# Altium PCB machin.PcbDoc
Units mil, origin at the board's own origin, x right, y up, seen from the top; angles counter-clockwise.
Board outline 10130 x 5470 mil, 2 copper layers (Top Layer, Bottom Layer); 41 components, 107 nets, 405 pads, 91 vias.
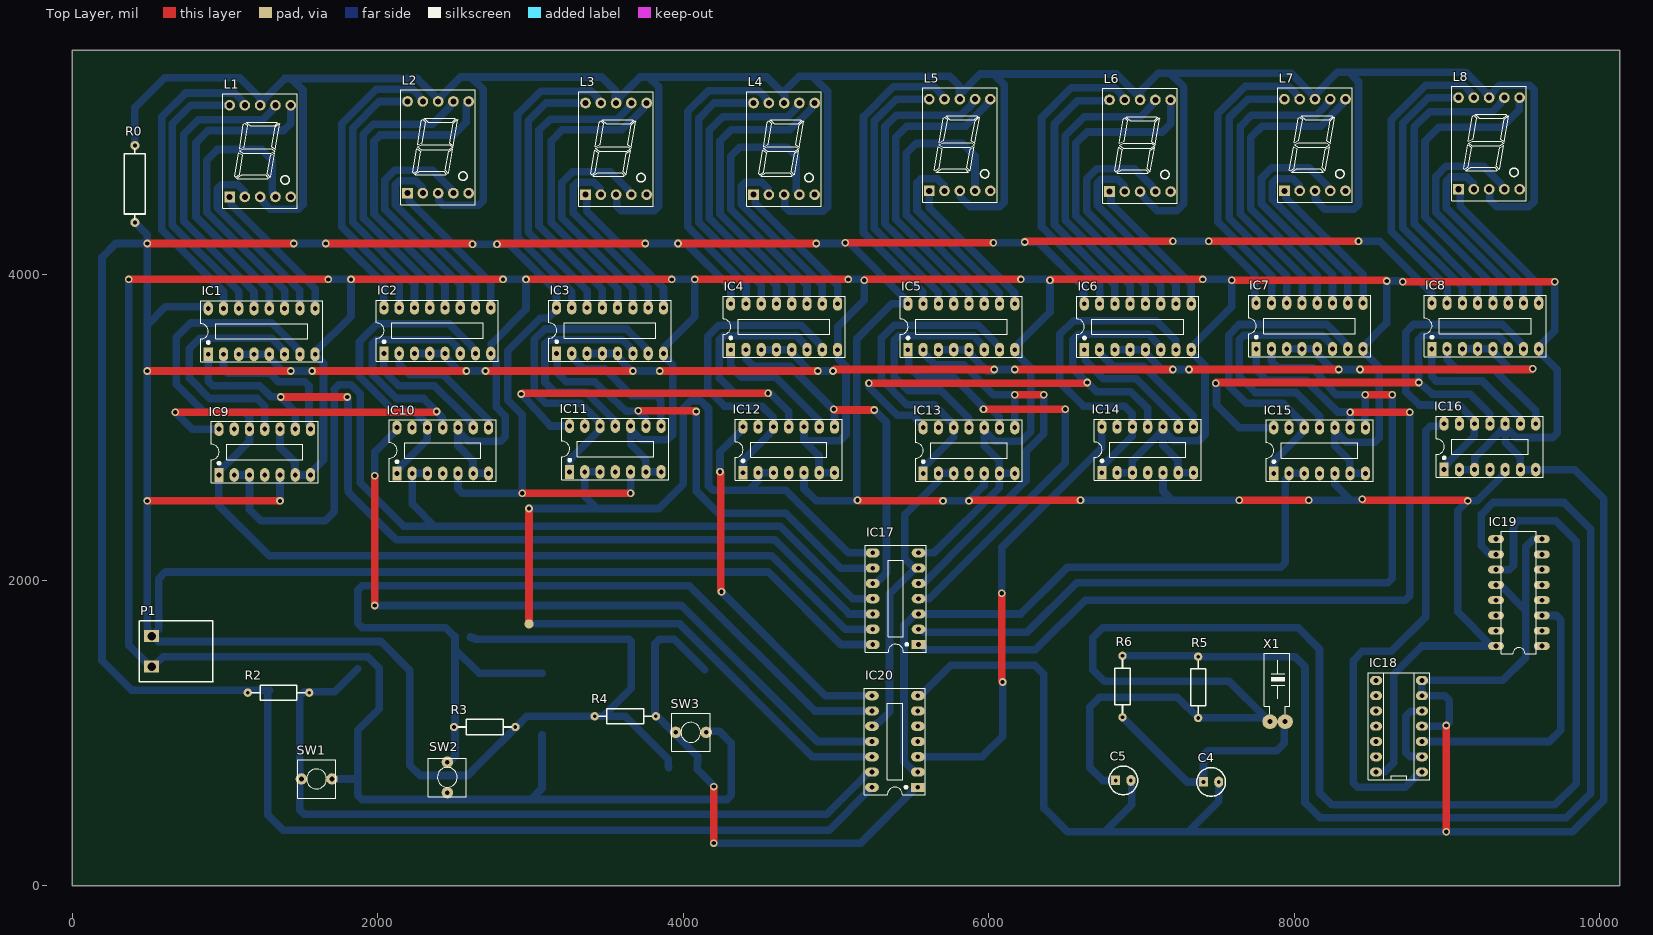
[diagram p0: Top Layer view]
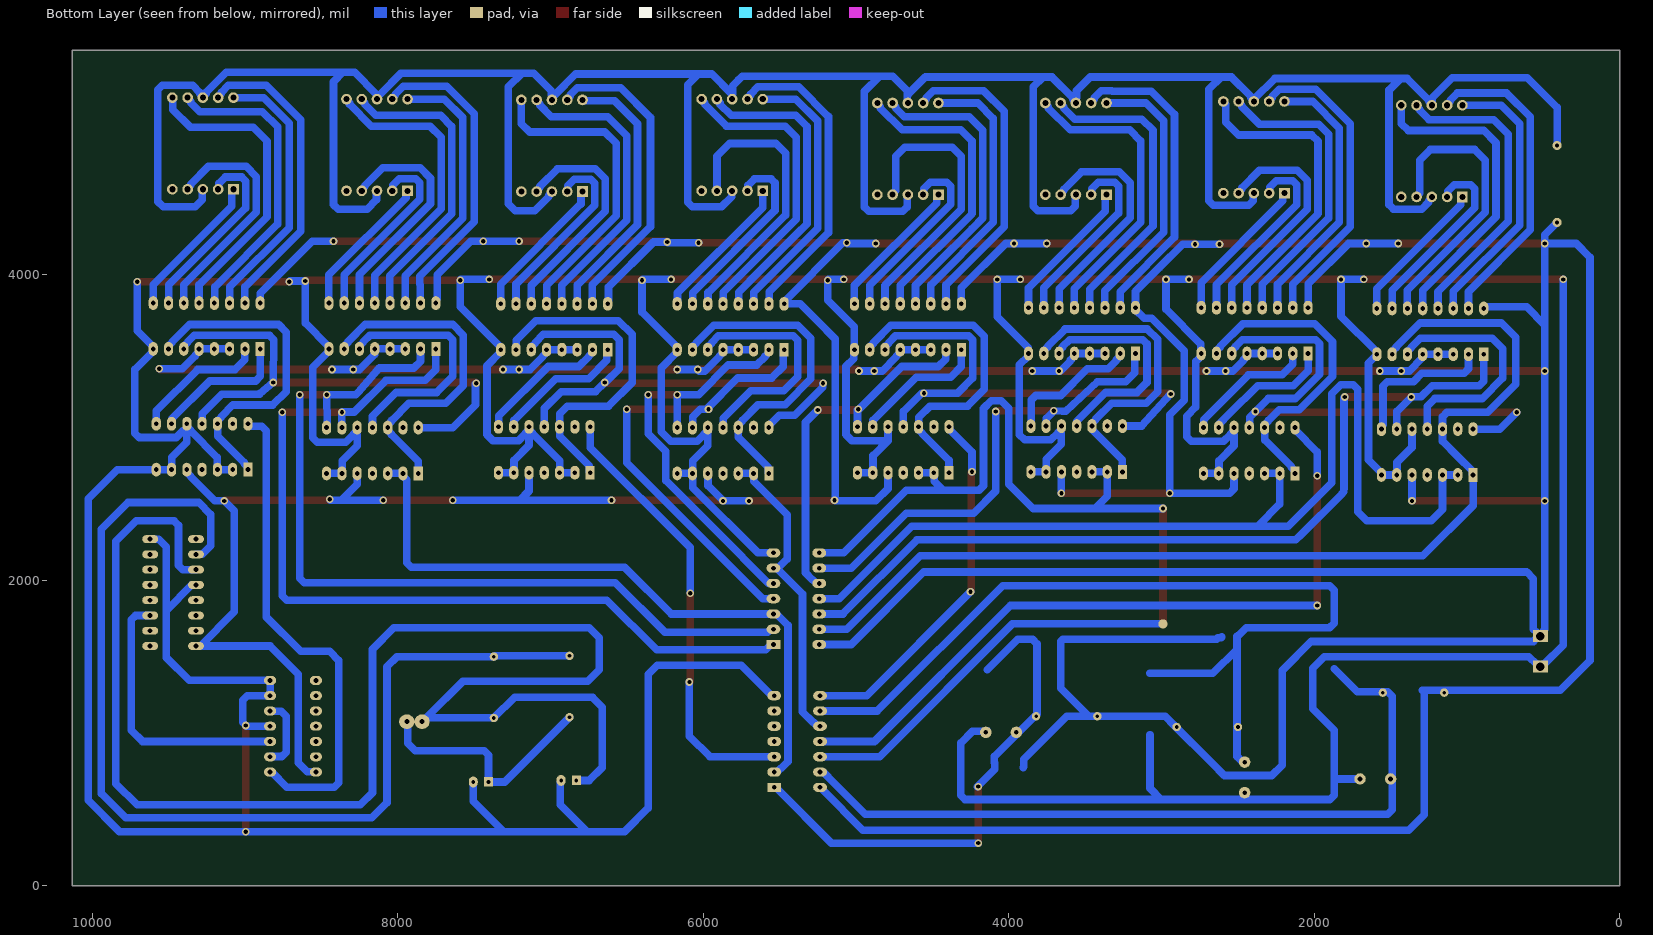
[diagram p1: Bottom Layer view, seen from below]

## Layer stack, top to bottom
Top Solder: solder mask 0.4, Solder Resist, Dk 3.5
Top Layer: signal copper 1.4
Dielectric 1: dielectric 12.6, FR-4, Dk 4.8
Bottom Layer: signal copper 1.4
Bottom Solder: solder mask 0.4, Solder Resist, Dk 3.5

## Board outline
0,0 10130,0 10130,5470 0,5470

## Design rules (kind name [scope] priority, off if disabled: settings)
Clearance [All] p1: gap=20 ignorepadtopadclearanceinfootprint=FALSE
PolygonConnect [All] p1: connectstyle=Relief reliefconductorwidth=10 reliefentries=4 polygonreliefangle="90 Angle" airgapwidth=10
RoutingLayers [All] p1: top layer_v5=FALSE bottom layer_v5=TRUE
RoutingVias [All] p1: holewidth=30 width=70 viastyle="Through Hole" minholewidth=30 minwidth=70 maxholewidth=30 maxwidth=70
SolderMaskExpansion [All] p1: expansion=4 istentingtop=FALSE
Width [All] p1: maxlimit=50 minlimit=50 preferedwidth=50
29 further rules are at their usual default settings.

## Components (designator, comment, footprint, x,y, rotation, side; value= is the part's Value field where it differs from the comment)
C4 "Cap Pol 3mm" C3MM 7455,680 r0 top
C5 "Cap Pol 3mm" C3MM 6880,690 r0 top
IC1 "74LS247" DIP16 890,3480 r0 top value=74LS238
IC2 "74LS247" DIP16 2040,3485 r0 top value=74LS238
IC3 "74LS247" DIP16 3170,3485 r0 top value=74LS238
IC4 "74LS247" DIP16 4310,3510 r0 top value=74LS238
IC5 "74LS247" DIP16 5470,3510 r0 top value=74LS238
IC6 "74LS247" DIP16 6625,3510 r0 top value=74LS238
IC7 "74LS247" DIP16 7750,3515 r0 top value=74LS238
IC8 "74LS247" DIP16 8900,3515 r0 top value=74LS238
IC9 "7490" DIP14/W0.3 960,2690 r0 top
IC10 "7490" DIP14/W0.3 2125,2700 r0 top
IC11 "7490" DIP14/W0.3 3255,2710 r0 top
IC12 "7490" DIP14/W0.3 4390,2705 r0 top
IC13 "7490" DIP14/W0.3 5570,2700 r0 top
IC14 "7490" DIP14/W0.3 6740,2705 r0 top
IC15 "7490" DIP14/W0.3 7865,2700 r0 top
IC16 "7490" DIP14/W0.3 8980,2725 r0 top
IC17 "7408" DIP14/W0.3 5540,1580 r90 top
IC18 "4013" DIP14 8685,1045 r90 top
IC19 "4060" *DIL16 9470,1920 r90 top
IC20 "7432" DIP14/W0.3 5535,645 r90 top
L1 "LED 7 Thanh" "LED 7x1 0.56" 1225,4785 r0 top
L2 "LED 7 Thanh" "LED 7x1 0.56" 2390,4810 r0 top
L3 "LED 7 Thanh" "LED 7x1 0.56" 3555,4800 r0 top
L4 "LED 7 Thanh" "LED 7x1 0.56" 4655,4800 r0 top
L5 "LED 7 Thanh" "LED 7x1 0.56" 5805,4825 r0 top
L6 "LED 7 Thanh" "LED 7x1 0.56" 6985,4820 r0 top
L7 "LED 7 Thanh" "LED 7x1 0.56" 8130,4825 r0 top
L8 "LED 7 Thanh" "LED 7x1 0.56" 9270,4835 r0 top
P1 "BIG_Header 2" "BIG_Header 2" 520,1635 r270 top
R0 "100R" "tro vach 1/2w" 410,4595 r90 top
R2 "620R" "tro vach 1/4w" 1350,1265 r180 top
R3 "620R" "tro vach 1/4w" 2700,1040 r0 top
R4 "620R" "tro vach 1/4w" 3620,1110 r180 top
R5 "620R" "tro vach 1/4w" 7370,1300 r90 top
R6 "620R" "tro vach 1/4w" 6875,1305 r90 top
SW1 "SW" SW2 1500,700 r0 top value="SW chip 2 pin"
SW2 "SW" SW2 2455,810 r270 top value="SW chip 2 pin"
SW3 "SW" SW2 3950,1005 r0 top value="SW chip 2 pin"
X1 "32,768 Khz" XT32k 7840,1075 r90 top value=32,768khz

## Footprints (in the part's own frame and the unit in brackets; to place one, negate y for a bottom-side part, rotate by r counter-clockwise, add the part's x,y. Pads: shape width x height; smd on the part's side, far side on the other; paste and mask are expansions set on the pad)
*DIL16 [mil]
  oval 52x104 hole 32: 1(-350,-150) 2(-250,-150) 3(-150,-150) 4(-50,-150) 5(50,-150) 6(150,-150) 7(250,-150) 8(350,-150) 9(350,150) 10(250,150) 11(150,150) 12(50,150) 13(-50,150) 14(-150,150) 15(-250,150) 16(-350,150)
  silkscreen extent -400,-115 400,115
"BIG_Header 2" [mm]
  rect 2x2.5 hole 1.4: 1(0,0) 2(5.08,0)
  silkscreen extent -2.54,-2.03 7.62,10.21, body extent -2.5,-1.75 7.58,10.25, height 3.15
C3MM [mm]
  rect 1.5x1.58 hole 0.6: 1(-1.27,0)
  oval 1.5x1.8 hole 0.6: 2(1.27,0)
  silkscreen extent -2.39,-2.39 2.39,2.39, body extent -2,-2.03 1.99,1.97, height 7.01
DIP14 [mm] "W.300/L.900"
  oval 1.5x2 hole 0.8: 1(-7.62,-3.81) 2(-5.08,-3.81) 3(-2.54,-3.81) 4(0,-3.81) 5(2.54,-3.81) 6(5.08,-3.81) 7(7.62,-3.81) 8(7.62,3.81) 9(5.08,3.81) 10(2.54,3.81) 11(0,3.81) 12(-2.54,3.81) 13(-5.08,3.81) 14(-7.62,3.81)
  silkscreen extent -8.89,-5.08 8.89,5.08, body extent -9.05,-3.88 9.05,3.88, height 4.5
DIP14/W0.3 [mil] "14PIN, W 300mil, Pin to pin 100mil"
  rect 60x90 hole 31: 1(0,0)
  oval 60x90 hole 31: 2(100,0) 3(200,0) 4(300,0) 5(400,0) 6(500,0) 7(600,0) 8(600,300) 9(500,300) 10(400,300) 11(300,300) 12(200,300) 13(100,300) 14(0,300)
  silkscreen extent -50,-50 650,350, body extent -75,-10 675,305, height 159
DIP16 [mil] "16 PIN, W 300mil, Pin to pin 100mil"
  rect 60x90 hole 31: 1(0,0)
  oval 60x90 hole 31: 2(100,0) 3(200,0) 4(300,0) 5(400,0) 6(500,0) 7(600,0) 8(700,0) 9(700,300) 10(600,300) 11(500,300) 12(400,300) 13(300,300) 14(200,300) 15(100,300) 16(0,300)
  silkscreen extent -50,-50 750,350, body extent -52,-57 752,356, height 299
"LED 7x1 0.56" [mil]
  rect 70x70 hole 40: 1(-195,-275)
  round 70 hole 40: 2(-95,-275) 3(5,-275) 4(105,-275) 5(205,-275) 6(205,325) 7(105,325) 8(5,325) 9(-95,325) 10(-195,325)
  silkscreen extent -239,-350 249,400, body extent -241,-349 251,399, height 315
SW2 [mil] "SW button 2pin, 250x 250 mil"
  round 75 hole 31: 1(0,0) 2(200,0)
  silkscreen extent -25,-125 225,125, body extent -18,-116 218,128, height 197
"tro vach 1/2w" [mm]
  round 1.5 hole 0.7: 1(-6.4,0) 2(6.4,0)
  silkscreen extent -5.84,-1.75 5.84,1.75, body extent -6.62,-1.75 6.62,1.75, height 3.5
"tro vach 1/4w" [mm]
  round 1.4 hole 0.6: 1(-5.1,0) 2(5.1,0)
  silkscreen extent -4.39,-1.25 4.42,1.25, body extent -5.38,-1.2 5.38,1.2, height 2.41
XT32k [mil] "Crystal 32k, 2 pin, real timer for DS1307"
  oval 95x100 hole 32: 1(0,0) 2(0,-100)
  silkscreen extent 50,-130 449,36

## Part data
C4 C5: "Polarized Capacitor (Axial)", LatestRevisionDate=17-Jul-2002, LatestRevisionNote="Re-released for DXP Platform.", PackageReference=POLAR0.8, Published=8-Jun-2000, Publisher="Altium Limited"
IC1 IC2 IC3 IC4 IC5 IC6 IC7 IC8: library part 74247, Copyright by=VanDungEvn@Gmail.com
IC9 IC10 IC11 IC12 IC13 IC14 IC15 IC16: "4-Bit Decade Counter"
IC17: "Quad 2-Input AND Gate"
IC18: "Dual D-Type Flip-Flop", Creat by=VanDungEvn@Gmail.com
IC19: "Standoff; Round; Nylon; 6-32x3/8 Thread; 1/4 OD; 3/4 Length", Package="TO-252-3 Abbatron", Check_prices=https://www.snapeda.com/parts/4060/Abbatron/view-part/?ref=eda, MF=Abbatron, MP=4060, SnapEDA_Link=https://www.snapeda.com/parts/4060/Abbatron/view-part/?ref=snap
IC20: "Quad 2-Input OR Gate"
L1 L2 L3 L4 L5 L6 L7 L8: library part "LED 7x1 0.56 Anot", "Dán", Chung_Loai=Dán, Don_Vi=Con, Ma_Hang=MH000834, Ten_Linh_Kien="Led 7 0.56 1 Số Anot (Sáng Đỏ)"
R0: library part "Tro Vach 1/2W 5% 100R", "Cắm", Chung_Loai=Cắm, Don_Vi=Con, Ma_Hang=MH007106, So_Chan=2, Ten_Linh_Kien="Trở 5% 1/2w 100R"
R2 R3 R4 R5 R6: library part "Tro Vach 1/4W 5% 620R", "Cắm", Chung_Loai=Cắm, Don_Vi=Con, Ma_Hang=MH007407, So_Chan=2, Ten_Linh_Kien="Trở Vạch 1/4W 5% 620R"
SW1 SW2 SW3: library part SW2, "Switch button 2 pin"
X1: library part XT32k, "Crystal 32,768kHz for timer real"

## Free pads (board coordinates)
  round 60 all layers, no hole: 55(2990,1715)

## Via types
v1: diameter 50, hole 28, Top Layer to Bottom Layer, 91 vias

## Nets (pads, with @x,y where several pads share a name; then routed paths per layer and width w, separated by ;. In a path a pad name is that pad's centre, name@x,y a point inside that pad or via, vN(x,y) a via of type N, cw(c..) or ccw(c..) an arc to the next point about the centre after c; other vN are vias at no path point)
GND: C4.2 C5.2 IC1.8 IC2.8 IC3.8 IC4.8 IC5.8 IC6.8 IC7.8 IC8.8 IC9.6 IC9.7 IC9.10 IC10.6 IC10.7 IC10.10 IC11.6 IC11.7 IC11.10 IC12.6 IC12.7 IC12.10 IC13.6 IC13.7 IC13.10 IC14.2 IC14.3 IC14.6 IC14.7 IC14.10 IC15.6 IC15.7 IC15.10 IC16.2 IC16.3 IC16.6 IC16.7 IC16.10 IC17.7 IC18.4 IC18.6 IC18.7 IC19.8 IC19.12 IC20.7 P1.2 SW1.2 SW2.2 SW3.2 | length 46957
  Top Layer w50: v1(370,3970) v1(1675,3970) ; v1(1825,3970) v1(2820,3970) ; v1(2970,3970) v1(3925,3970) ; v1(4075,3970) v1(5080,3970) ; v1(5185,3965) 5190,3970 v1(6210,3970) ; v1(6400,3965) 6405,3970 v1(7400,3970) ; v1(7590,3965) 8600,3965 v1(8605,3960) ; v1(8710,3955) v1(9705,3955) ; v1(8995,355) v1(8995,1050)
  Bottom Layer w50: v1(370,3970) 370,1575.16 495.79,1449.37 505.63,1449.37 P1.2 534.37,1449.37 544.21,1449.37 594.84,1500 1935,1500 2010,1425 2010,1159.21 1870,1019.21 1870,705 ; IC9.10@1361.91,2967.02 1361.91,2988.09 IC9.10 1360,2870 1458.09,2771.91 1458.09,2691.91 IC9.6 IC9.7 1563.27,2693.27 1563.27,2708.27 1645,2790 1645,3420.71 1602.62,3463.09 1594.62,3463.09 1590,3467.71 IC1.8 1590,3495 1825,3730 v1(1825,3970) v1(1675,3970) ; SW1.2 1865,700 1870,705 ; 2525,2953.93 2525,2880 2623.09,2781.91 2623.09,2701.91 IC10.6 IC10.7 ; IC10.10 2525,2982.29 2550,2957.29 2550,2953.93 2593.93,2910 2805.71,2910 2835,2939.29 2835,3075 2775,3135 2775,3432.29 2740,3467.29 IC2.8 2741.91,3486.91 2741.91,3546.91 2970,3775 v1(2970,3970) v1(2820,3970) ; 3075,989.21 3075,640 3000,565 ; 3655,2963.93 3655,2890 3753.09,2791.91 3753.09,2711.91 IC11.6 IC11.7 ; IC11.10 3655,2992.29 3680,2967.29 3680,2963.93 3723.93,2920 3895.71,2920 3930,2954.29 3930,3410 3873.27,3466.73 3873.27,3481.73 IC3.8 3871.91,3486.91 3871.91,3521.91 4075,3725 v1(4075,3970) v1(3925,3970) ; SW3.2@4140,1014.21 4140.98,1013.23 4236.77,1013.23 4315,935 4315,594.29 4285.71,565 3000,565 ; IC12.10 4790,2915 ; IC12.7 IC12.6 4888.09,2706.91 4888.09,2816.91 4790,2915 ; v1(5080,3970) 5180,3970 v1(5185,3965) 5185,3834.81 5010,3659.81 IC4.8 5011.91,3508.09 5011.91,3486.02 5014.78,3483.15 5014.78,3451.29 5065,3401.07 5065,2954.29 5025.71,2915 4790,2915 ; IC20.7 5550,1245 5750,1445 6300,1445 6360,1385 6360,510 6515,355 6760,355 ; IC17.7 5641.01,2180 6068.09,2607.08 6068.09,2698.09 IC13.6 ; IC13.10 IC13.10@5970,2982.29 ; IC13.7 IC13.6 ; v1(6210,3970) 6395,3970 v1(6400,3965) 6400,3755 6173.27,3528.27 6173.27,3513.27 IC5.8 6170,3495 6275,3390 6275,2973.76 6211.24,2910 6038.93,2910 5995,2953.93 5995,2957.29 IC13.10@5970,2982.29 ; IC14.2 IC14.3 6940,2783.93 7115,2958.93 7115,2962.29 IC14.10@7140,2987.29 ; C5.2 6930,681.64 6935,676.64 6935,530 6760,355 ; 7140,2958.93 7140,2885 7238.09,2786.91 7238.09,2706.91 IC14.6 IC14.7 ; IC14.10 IC14.10@7140,2987.29 ; v1(7400,3970) 7585,3970 v1(7590,3965) 7590,3790 7328.27,3528.27 7328.27,3513.27 IC6.8 7328.27,3506.73 7328.27,3491.73 7415,3405 7415,2954.29 7375.71,2915 7208.93,2915 7165,2958.93 7165,2962.29 IC14.10@7140,2987.29 ; C4.2 7505,555 7305,355 ; 8265,2953.93 8265,2879.94 8363.09,2781.85 8363.09,2701.91 IC15.6 IC15.7 ; IC15.10 8265,2982.29 8290,2957.29 8290,2953.93 8338.93,2905 8525.71,2905 8555,2934.29 8555,3395 8450,3500 IC7.8 8450,3530 8605,3685 v1(8605,3960) 8705,3960 v1(8710,3955) ; IC18.4 8990,1045 9015,1070 9015,1215.71 8985.71,1245 IC18.6 IC18.7 9365,1345 9515,1495 9515,1801.41 ; IC16.2 IC16.3 9180,2803.93 9355,2978.93 9355,2982.29 9380,3007.29 IC16.10 ; IC19.12 9346.41,1970 9515,1801.41 ; 9380,2978.93 9380,2905 9478.09,2806.91 9478.09,2726.91 IC16.6 ; 9405,2978.93 9448.93,2935 9690.71,2935 9720,2964.29 9720,3380 9600,3500 IC8.8 9600,3530 9705,3635 v1(9705,3955) ; IC16.6@9495,2725 IC16.7 9835,2725 10025,2535 10025,559.29 9820.71,355 v1(8995,355) 7305,355 ; IC19.8 9619.62,2269.62 9564.62,2269.62 9515,2220 9515,1801.41 ; 1870,705 1870,594.29 1899.29,565 3000,565 ; IC13.10@5970,2982.29 5970,2880 6068.09,2781.91 6068.09,2701.91 IC13.6 ; 6760,355 7305,355
NetC4_1: C4.1 R6.1 X1.2 | length 1586.3
  Bottom Layer w50: R6.1 7299.21,680 C4.1 7405,855.71 7434.29,885 7885,885 7935,935 7935,1070 X1.2
NetC5_1: C5.1 IC19.11 R5.1 X1.1 | length 10068
  Bottom Layer w50: C5.1 6825.51,690 6825.47,689.96 6744.62,689.96 6659.62,774.96 6659.62,1169.96 6724.62,1234.96 7233.83,1234.96 7369.58,1099.21 R5.1 7370.75,1099.96 X1.1@7799.94,1099.96 ; X1.1 7837.08,1075 7806.03,1106.05 7572.12,1339.96 6754.62,1339.96 6679.62,1414.96 6679.62,1624.96 6744.62,1689.96 8024.62,1689.96 8164.62,1549.96 8164.62,609.96 8244.62,529.96 9704.62,529.96 9844.62,669.96 9844.62,2255.67 9710.33,2389.96 9464.29,2389.96 9435,2360.67 9435,2099.63 9405.71,2070.34 9320.34,2070.34 IC19.11
NetIC1_1: IC1.1 IC9.9 IC17.12 | length 5766.7
  Top Layer w50: v1(1365,3200) v1(1800,3200)
  Bottom Layer w50: IC1.1 890,3304.29 919.29,3275 1228,3275 1301.09,3201.91 1363.09,3201.91 v1(1365,3200) 1460,3105 IC9.9 ; v1(1800,3200) 1805.39,3194.61 1805.39,2599.87 1805.58,2599.69 1805.58,2579.42 1820.03,2564.96 2085,2300 2120,2265 4600,2265 5085,1780 IC17.12
NetIC1_2: IC1.2 IC9.8 | length 987.6
  Bottom Layer w50: IC1.2 990,3384.29 1019.29,3355 1294.94,3355 1349.94,3300 1520.71,3300 1550,3270.71 1550,3017.71 1560,3007.71 IC9.8
NetIC1_6: IC1.6 IC9.11 | length 1621.5
  Bottom Layer w50: IC9.11 1260,3140 1210,3190 900,3190 765,3325 765,3515 835,3585 1306.07,3585 1365,3526.07 1365,3522.71 1390,3497.71 IC1.6
NetIC1_7: IC1.7 IC9.1 IC9.12 IC17.13 | length 7099.4
  Bottom Layer w50: IC1.7 1490,3497.71 1465,3522.71 1465,3526.07 1306.07,3685 775,3685 680,3590 680,3285 865,3100 1130.71,3100 1160,3070.71 IC9.12 1160,2911.07 1061.97,2813.03 965,2716.07 965,2695 IC9.1 960,2490 1290,2160 4580,2160 5060,1680 IC17.13
NetIC1_9: IC1.9 L1.1 | length 962
  Bottom Layer w50: L1.1 1040,4500 1040,4460 1590,3910 IC1.9
NetIC1_10: IC1.10 L1.2 | length 1251.1
  Bottom Layer w50: L1.2 1126.17,4513.83 1126.17,4547.47 1083.64,4590 976.36,4590 950,4563.64 950,4440 1490,3900 IC1.10
NetIC1_11: IC1.11 L1.4 | length 1917.5
  Bottom Layer w50: L1.4 1330,4515.41 1310,4535.41 1310,4750 1240,4820 950,4820 880,4750 880,4410 1390,3900 IC1.11
NetIC1_12: IC1.12 L1.6 | length 2075.6
  Bottom Layer w50: IC1.12 1290,3900 810,4380 810,4865 890,4945 1385,4945 1430,4990 L1.6
NetIC1_13: IC1.13 L1.7 | length 2016.9
  Bottom Layer w50: IC1.13 1190,3890 730,4350 730,4920 825,5015 1248.14,5015 1310,5076.86 1310,5084.59 1330,5104.59 L1.7
NetIC1_14: IC1.14 L1.10 | length 1814.9
  Bottom Layer w50: L1.10 775,5110 655,4990 655,4326.01 1090,3891.01 IC1.14
NetIC1_15: IC1.15 L1.9 | length 2072
  Bottom Layer w50: IC1.15 990,3890 585,4295 585,5033.62 741.38,5190 1063.14,5190 1110,5143.14 1110,5135.41 1130,5115.41 L1.9
NetIC2_1: IC2.1 IC10.9 | length 863.8
  Bottom Layer w50: IC2.1 2040,3372.99 2137.99,3275 2370,3275 2555,3090 2556.07,3090 2620,3026.07 2620,3022.71 2625,3017.71 IC10.9
NetIC2_2: IC2.2 IC10.8 | length 856.2
  Bottom Layer w50: IC2.2 2140,3415 2210,3345 2430,3345 2723.09,3051.91 2723.09,3001.91 IC10.8
NetIC2_6: IC2.6 IC9.14 IC10.11 | length 3520.5
  Top Layer w50: v1(675,3100) 2380,3100 v1(2385,3105)
  Bottom Layer w50: v1(675,3100) 785,2990 IC9.14 ; IC10.11 2423.09,3001.91 2423.09,3066.91 2300,3190 2123.99,3190 1965,3348.99 1965,3548.64 1991.36,3575 2471.07,3575 2515,3531.07 2515,3527.71 2540,3502.71 IC2.6
NetIC2_7: IC2.7 IC10.1 IC10.12 | length 2108.3
  Bottom Layer w50: IC10.1 2125,2715 2150,2740 2150,2746.07 2323.09,2919.15 2323.09,2998.09 IC10.12 2325,3017.71 2300,3042.71 2300,3046.07 2229.26,3116.8 2098.2,3116.8 1880,3335 1880,3562.63 1997.37,3680 2466.07,3680 2615,3531.07 2615,3527.71 2640,3502.71 IC2.7
NetIC2_9: IC2.9 L2.1 | length 975.7
  Bottom Layer w50: L2.1 2205,4525 2205,4483.99 2740,3948.99 IC2.9
NetIC2_10: IC2.10 L2.2 | length 1264.9
  Bottom Layer w50: L2.2 2291.17,4538.83 2291.17,4572.47 2248.64,4615 2141.36,4615 2115,4588.64 2115,4459.13 2640,3934.13 IC2.10
NetIC2_11: IC2.11 L2.4 | length 1585.4
  Bottom Layer w50: L2.4 2495,4540.41 2475,4560.41 2475,4568.14 2358.14,4685 2112.37,4685 2045,4617.63 2045,4430.13 2540,3935.13 IC2.11
NetIC2_12: IC2.12 L2.6 | length 2080.6
  Bottom Layer w50: IC2.12 2440,3936.14 1975,4401.14 1975,4875 2015,4915 2495,4915 2580,5000 2580,5114.59 2595,5129.59 L2.6
NetIC2_13: IC2.13 L2.7 | length 2001.9
  Bottom Layer w50: IC2.13 2340,3937.14 1905,4372.14 1905,4920 1970,4985 2358.14,4985 2475,5101.86 2475,5109.59 2495,5129.59 L2.7
NetIC2_14: IC2.14 L2.10 | length 1775.2
  Bottom Layer w50: L2.10 2010,5135 1835,4960 1835,4343.15 2240,3938.15 IC2.14
NetIC2_15: IC2.15 L2.9 | length 2023.8
  Bottom Layer w50: IC2.15 2140,3939.15 1765,4314.15 1765,4988.99 1991.01,5215 2228.14,5215 2275,5168.14 2275,5160.41 2295,5140.41 L2.9
NetIC3_1: IC3.1 IC11.9 IC17.9 | length 3144.3
  Top Layer w50: v1(3705,3110) 4067.29,3110 4072.29,3105 v1(4085,3105)
  Bottom Layer w50: IC3.1 3175,3480 3175,3360 3235,3300 3418.55,3300 3625.95,3107.78 3646.51,3107.78 3647.45,3107.81 v1(3705,3110) 3705,3107.29 3753.09,3059.21 3753.09,3011.91 IC11.9 ; v1(4085,3105) 4085,2585 4230,2440 4670,2440 5030,2080 IC17.9
NetIC3_2: IC3.2 IC11.8 | length 893
  Bottom Layer w50: IC3.2 3270,3467.29 3295,3442.29 3295,3438.93 3348.93,3385 3485,3385 3660,3210 3823.8,3210 3853.09,3180.71 3853.09,3011.91 IC11.8
NetIC3_6: IC3.6 IC11.11 | length 1484.8
  Bottom Layer w50: IC11.11 3553.09,3011.91 3553.09,3041.91 3365,3230 3160,3230 3095,3295 3095,3548.64 3121.36,3575 3601.07,3575 3645,3531.07 3645,3527.71 3670,3502.71 IC3.6
NetIC3_7: IC3.7 IC11.1 IC11.12 | length 2112.5
  Bottom Layer w50: IC11.1 3256.07,2711.07 3256.07,2790 3453.09,2987.02 3453.09,3008.09 IC11.12 3455,3027.71 3430,3052.71 3430,3056.07 3326.07,3160 3100,3160 3025,3235 3025,3577.63 3092.37,3645 3631.07,3645 3745,3531.07 3745,3527.71 3770,3502.71 IC3.7
NetIC3_9: IC3.9 L3.1 | length 951.2
  Bottom Layer w50: L3.1 3368.99,4516.01 3368.99,4415 3870,3913.99 IC3.9
NetIC3_10: IC3.10 L3.2 | length 1240.4
  Bottom Layer w50: L3.2 3456.17,4528.83 3456.17,4562.47 3413.64,4605 3306.36,4605 3280,4578.64 3280,4500 3280,4405 3770,3915 IC3.10
NetIC3_11: IC3.11 L3.4 | length 1565
  Bottom Layer w50: L3.4 3660,4530.41 3640,4550.41 3640,4558.14 3523.14,4675 3277.37,4675 3205,4602.63 3205,4373.99 3670,3908.99 IC3.11
NetIC3_12: IC3.12 L3.6 | length 2006.8
  Bottom Layer w50: IC3.12 3570,3910 3135,4345 3135,4875.71 3208.08,4948.79 3596.92,4948.79 3740,5091.86 3740,5099.59 3760,5119.59 L3.6
NetIC3_13: IC3.13 L3.7 | length 2019.6
  Bottom Layer w50: IC3.13 3470,3905 3055,4320 3055,4945.71 3128.08,5018.79 3566.92,5018.79 3640,5091.86 3640,5099.59 3660,5119.59 L3.7
NetIC3_14: IC3.14 L3.10 | length 1806.1
  Bottom Layer w50: L3.10 3101.68,5125 2985,5008.32 2985,4280 3370,3895 IC3.14
NetIC3_15: IC3.15 L3.9 | length 2062.1
  Bottom Layer w50: IC3.15 3270,3890 2915,4245 2915,5050 3065.87,5200.87 3322.73,5200.87 3326.86,5205 3393.14,5205 3440,5158.14 3440,5150.41 3460,5130.41 L3.9
NetIC4_1: IC4.1 IC12.9 | length 877
  Bottom Layer w50: IC4.1 4310,3400 4380,3330 4605,3330 4888.09,3046.91 4888.09,3006.91 IC12.9
NetIC4_2: IC4.2 IC12.8 IC17.10 | length 2366.5
  Top Layer w50: v1(4985,3120) 4990,3115 v1(5250,3115)
  Bottom Layer w50: IC4.2 4411.75,3508.25 4411.75,3448.25 4460,3400 4699.94,3400 4979.94,3120 v1(4985,3120) ; IC12.8 v1@4990,3115 ; IC17.10 5257.71,1980 5282.71,2005 5286.07,2005 5330,2048.93 5330,3035 v1(5250,3115)
NetIC4_6: IC4.6 IC11.14 IC12.11 | length 3555.6
  Top Layer w50: v1(2940,3220) 2945,3225 v1(4555,3225)
  Bottom Layer w50: v1(2940,3220) 3130,3010 IC11.14 ; IC12.11 4690,3105 4570,3225 4335,3225 4235,3325 4235,3573.64 4261.36,3600 4741.07,3600 4785,3556.07 4785,3552.71 4810,3527.71 IC4.6
NetIC4_7: IC4.7 IC12.1 IC12.12 | length 2155.7
  Bottom Layer w50: IC12.1 4391.07,2706.07 4391.07,2785 4488.03,2881.97 4565,2958.93 4565,2962.29 4590,2987.29 IC12.12 4588.25,3006.75 4588.25,3066.75 4515,3140 4270,3140 4160,3250 4160,3597.63 4232.37,3670 4771.07,3670 4885,3556.07 4885,3552.71 4910,3527.71 IC4.7
NetIC4_9: IC4.9 L4.1 | length 942.8
  Bottom Layer w50: L4.1 4470,4515 4470,4470 5010,3930 IC4.9
NetIC4_10: IC4.10 L4.2 | length 1231.9
  Bottom Layer w50: L4.2 4556.17,4528.83 4556.17,4562.47 4513.64,4605 4406.36,4605 4380,4578.64 4380,4461.01 4910,3931.01 IC4.10
NetIC4_11: IC4.11 L4.4 | length 1910.1
  Bottom Layer w50: L4.4 4760,4530.41 4740,4550.41 4740,4775 4680,4835 4370,4835 4310,4775 4310,4430 4810,3930 IC4.11
NetIC4_12: IC4.12 L4.6 | length 1991.3
  Bottom Layer w50: IC4.12 4710,3931.01 4240,4401.01 4240,4875.71 4313.08,4948.79 4696.92,4948.79 4840,5091.86 4840,5099.59 4860,5119.59 L4.6
NetIC4_13: IC4.13 L4.7 | length 1989.9
  Bottom Layer w50: IC4.13 4610,3932.01 4478.99,4063.02 4240,4302.01 4170,4372.01 4170,4945.71 4259.29,5035 4683.14,5035 4740,5091.86 4740,5099.59 4760,5119.59 L4.7
NetIC4_14: IC4.14 L4.10 | length 1785.2
  Bottom Layer w50: L4.10 4201.84,5125 4100,5023.16 4100,4343.02 4510,3933.02 IC4.14
NetIC4_15: IC4.15 L4.9 | length 2044.2
  Bottom Layer w50: IC4.15 4410,3934.02 4030,4314.02 4030,5070 4165,5205 4493.14,5205 4540,5158.14 4540,5150.41 4560,5130.41 L4.9
NetIC5_1: IC5.1 IC13.9 IC17.4 | length 3135.8
  Top Layer w50: v1(5965,3120) v1(6500,3120)
  Bottom Layer w50: IC5.1 5475,3505 5475,3400 5550,3325 5774.27,3325 5788.92,3310.36 ; IC17.4 5610,1880 6500,2770 v1(6500,3120) ; 5788.93,3310.34 5789.14,3310.13 5965,3134.27 v1(5965,3120) 6020,3120 6068.09,3071.91 6068.09,3001.91 IC13.9
NetIC5_2: IC5.2 IC13.8 IC17.5 | length 2732.4
  Top Layer w50: v1(6170,3215) v1(6360,3215)
  Bottom Layer w50: IC17.5 5541.91,1981.91 5572.98,1981.91 5908.99,2317.92 6245,2653.93 6245,2844.76 6360,2959.76 v1(6360,3215) ; IC5.2 5570,3492.29 5595,3467.29 5595,3463.93 5648.93,3410 5835,3410 6030,3215 v1(6170,3215) IC13.8
NetIC5_6: IC5.6 IC13.11 | length 1552.5
  Bottom Layer w50: IC13.11 5868.25,3001.75 5868.25,3061.75 5688.61,3241.39 5471.6,3241.39 5380,3332.99 5380,3570.71 5409.29,3600 5901.07,3600 5945,3556.07 5945,3552.71 5970,3527.71 IC5.6
NetIC5_7: IC5.7 IC13.1 IC13.12 | length 2157
  Bottom Layer w50: IC13.1 5575,2705 5575,2741.07 5658.93,2825 5770,2936.07 5770,3017.71 5745,3042.71 5745,3046.07 5641.07,3150 5463.99,3150 5295,3318.99 5295,3584.71 5380.29,3670 5931.07,3670 6045,3556.07 6045,3552.71 6070,3527.71 IC5.7
NetIC5_9: IC5.9 L5.1 | length 972
  Bottom Layer w50: L5.1 5610,4440 6168.09,3881.91 6168.09,3811.91 IC5.9
NetIC5_10: IC5.10 L5.2 | length 1261.1
  Bottom Layer w50: L5.2 5706.17,4553.83 5706.17,4587.47 5663.64,4630 5556.36,4630 5530,4603.64 5530,4421.01 6068.09,3882.92 6068.09,3811.91 IC5.10
NetIC5_11: IC5.11 L5.4 | length 1933.4
  Bottom Layer w50: L5.4 5909.82,4550.18 5909.82,4775.18 5825,4860 5525,4860 5460,4795 5460,4392.01 5968.09,3883.92 5968.09,3811.91 IC5.11
NetIC5_12: IC5.12 L5.6 | length 2020.5
  Bottom Layer w50: IC5.12 5868.09,3811.91 5868.09,3884.93 5390,4363.02 5390,4900.71 5463.08,4973.79 5846.92,4973.79 5990,5116.86 5990,5124.59 6010,5144.59 L5.6
NetIC5_13: IC5.13 L5.7 | length 2019.1
  Bottom Layer w50: IC5.13 5768.09,3811.91 5768.09,3885.93 5628.99,4025.03 5390,4264.02 5320,4334.02 5320,4970.71 5393.08,5043.79 5816.92,5043.79 5890,5116.86 5890,5124.59 5910,5144.59 L5.7
NetIC5_14: IC5.14 L5.10 | length 1790.2
  Bottom Layer w50: L5.10 5392.99,5150 5250,5007.01 5250,4305.03 5668.09,3886.94 5668.09,3811.91 IC5.14
NetIC5_15: IC5.15 L5.9 | length 2038.7
  Bottom Layer w50: IC5.15 5568.09,3811.91 5568.09,3887.94 5180,4276.03 5180,5036.01 5373.99,5230 5643.14,5230 5690,5183.14 5690,5175.41 5710,5155.41 L5.9
NetIC6_1: IC6.1 IC14.9 | length 885.7
  Bottom Layer w50: IC6.1 6630,3505 6630,3440 6750,3320 6965,3320 7238.09,3046.91 7238.09,3006.91 IC14.9
NetIC6_2: IC6.2 IC14.8 | length 877.5
  Bottom Layer w50: IC6.2 6725,3492.29 6750,3467.29 6750,3463.93 6813.93,3400 7014.94,3400 7338.09,3076.85 7338.09,3006.91 IC14.8
NetIC6_6: IC6.6 IC13.14 IC14.11 | length 3479.2
  Top Layer w50: v1(5215,3290) 6640,3290 v1(6645,3295)
  Bottom Layer w50: v1(5215,3290) 5216.91,3288.09 5216.91,3263.09 5400,3080 5502.29,3080 5570,3012.29 IC13.14 ; IC14.11 7040,3125 6930,3235 6705,3235 v1(6645,3295) 6640,3295 6550,3385 6550,3573.64 6586.36,3610 7046.07,3610 7100,3556.07 7100,3552.71 7125,3527.71 IC6.6
NetIC6_7: IC6.7 IC14.1 IC14.12 | length 2253.9
  Bottom Layer w50: IC14.1 6745,2710 6745,2750 6938.25,2943.25 6938.25,3003.25 IC14.12 6940,3090 6890,3140 6620,3140 6465,3295 6465,3610 6555,3700 7095,3700 7223.25,3571.75 7223.25,3511.75 IC6.7
NetIC6_9: IC6.9 L6.1 | length 956.6
  Bottom Layer w50: L6.1 6800,4535 6800,4463.99 7325,3938.99 IC6.9
NetIC6_10: IC6.10 L6.2 | length 1245.7
  Bottom Layer w50: L6.2 6886.17,4548.83 6886.17,4582.47 6843.64,4625 6736.36,4625 6710,4598.64 6710,4455 7225,3940 IC6.10
NetIC6_11: IC6.11 L6.4 | length 1566.3
  Bottom Layer w50: L6.4 7090,4550.41 7070,4570.41 7070,4578.14 6953.14,4695 6707.37,4695 6640,4627.63 6640,4415 7125,3930 IC6.11
NetIC6_12: IC6.12 L6.6 | length 2067.7
  Bottom Layer w50: IC6.12 7025,3931.01 6570,4386.01 6570,4860 6645,4935 7135.71,4935 7190,4989.29 L6.6
NetIC6_13: IC6.13 L6.7 | length 1971.1
  Bottom Layer w50: IC6.13 6925,3932.01 6500,4357.01 6500,4910 6625,5035 6993.14,5035 7070,5111.86 7070,5119.59 7090,5139.59 L6.7
NetIC6_14: IC6.14 L6.10 | length 1767.6
  Bottom Layer w50: L6.10 6786.17,5141.17 6772.03,5141.17 6770.86,5140 6580.29,5140 6430,4989.71 6430,4328.02 6825,3933.02 IC6.14
NetIC6_15: IC6.15 L6.9 | length 2044
  Bottom Layer w50: IC6.15 6725,3934.02 6345,4314.02 6345,5030 6540,5225 6823.14,5225 6870,5178.14 6870,5170.41 6890,5150.41 L6.9
NetIC7_1: IC7.1 IC15.9 IC17.1 | length 5933.4
  Top Layer w50: v1(8365,3100) v1(8755,3100)
  Bottom Layer w50: IC17.1 5555,1580 5560,1575 5560,1574.29 5589.29,1545 6305,1545 6630,1870 8725.71,1870 8755,1899.29 v1(8755,3100) ; IC7.1 7750,3380 7820,3310 8076.07,3310 8284.15,3101.91 8363.09,3101.91 v1(8365,3100) IC15.9
NetIC7_2: IC7.2 IC15.8 IC17.2 | length 5639.6
  Top Layer w50: v1(8465,3215) v1(8640,3215)
  Bottom Layer w50: IC17.2 5557.71,1680 5577.71,1660 6250,1660 6575,1985 8610.71,1985 8640,2014.29 v1(8640,3215) ; IC7.2 7850,3435 7895,3390 8118.79,3390 8133.44,3375.36 8134.72,3374.08 8257.56,3232.04 8273.35,3216.25 8293.87,3216.11 v1(8465,3215) 8460,3022.71 8465,3017.71 IC15.8
NetIC7_6: IC7.6 IC15.11 | length 1620.2
  Bottom Layer w50: IC15.11 8165,3075 8010,3230 7745,3230 7640,3335 7640,3575.71 7669.29,3605 8181.07,3605 8225,3561.07 8225,3557.71 8250,3532.71 IC7.6
NetIC7_7: IC7.7 IC15.1 IC15.12 | length 2221.7
  Bottom Layer w50: IC15.1 7866.07,2701.07 7866.07,2780 7963.03,2876.97 8040,2953.93 8040,2957.29 8065,2982.29 IC15.12 8065,3017.71 8040,3042.71 8040,3046.07 7926.07,3160 7685,3160 7570,3275 7570,3605 7640,3675 8211.07,3675 8325,3561.07 8325,3557.71 8350,3532.71 IC7.7
NetIC7_9: IC7.9 L7.1 | length 948.3
  Bottom Layer w50: L7.1 7945,4540 7945,4504.12 8450,3999.12 IC7.9
NetIC7_10: IC7.10 L7.2 | length 1237.4
  Bottom Layer w50: L7.2 8031.17,4553.83 8031.17,4587.47 7988.64,4630 7881.36,4630 7855,4603.64 7855,4495.12 8350,4000.12 IC7.10
NetIC7_11: IC7.11 L7.4 | length 1558
  Bottom Layer w50: L7.4 8235,4555.41 8215,4575.41 8215,4583.14 8098.14,4700 7852.37,4700 7785,4632.63 7785,4466.13 8250,4001.13 IC7.11
NetIC7_12: IC7.12 L7.6 | length 1996.8
  Bottom Layer w50: IC7.12 8150,3997.01 7715,4432.01 7715,4900.71 7788.08,4973.79 8171.92,4973.79 8315,5116.86 8315,5124.59 8335,5144.59 L7.6
NetIC7_13: IC7.13 L7.7 | length 1997
  Bottom Layer w50: IC7.13 8051.91,3816.91 8051.91,3993.09 7645,4400 7645,4970.71 7718.08,5043.79 8141.92,5043.79 8215,5116.86 8215,5124.59 8235,5144.59 L7.7
NetIC7_14: IC7.14 L7.10 | length 1780
  Bottom Layer w50: L7.10 7695,5150 7575,5030 7575,4370 7950,3995 IC7.14
NetIC7_15: IC7.15 L7.9 | length 2043.7
  Bottom Layer w50: IC7.15 7851.91,3816.91 7851.91,3934.62 7855.5,3938.21 7855.5,3990.5 7498,4348 7498,5053 7680,5235 7963.14,5235 8015,5183.14 8015,5175.41 8035,5155.41 L7.9
NetIC8_1: IC8.1 IC16.9 | length 906
  Bottom Layer w50: IC8.1 8900,3335 8930,3305 9230,3305 9478.09,3056.91 9478.09,3026.91 IC16.9
NetIC8_2: IC8.2 IC16.8 | length 873.8
  Bottom Layer w50: IC8.2 9000,3445 9065,3380 9310,3380 9580,3110 IC16.8
NetIC8_6: IC8.6 IC15.14 IC16.11 | length 3457.7
  Top Layer w50: v1(7485,3290) 7490,3295 v1(8815,3295)
  Bottom Layer w50: v1(7485,3290) 7490,3285 7490,3150 7640,3000 IC15.14 ; IC16.11 9280,3090 9151.97,3218.03 8901.97,3218.03 8901.97,3223.03 v1(8815,3295) 8810,3575.71 8839.29,3605 9331.07,3605 9375,3561.07 9375,3557.71 9400,3532.71 IC8.6
NetIC8_7: IC8.7 IC16.1 IC16.12 | length 2191.5
  Bottom Layer w50: IC16.1 8980,2740 9005,2765 9005,2771.07 9178.09,2944.15 9178.09,3023.09 IC16.12 9180,3042.71 9155,3067.71 9155,3071.07 9078.03,3148.03 8816.97,3148.03 8730,3235 8730,3625 8780,3675 9361.07,3675 9475,3561.07 9475,3557.71 9500,3532.71 IC8.7
NetIC8_9: IC8.9 L8.1 | length 962.5
  Bottom Layer w50: L8.1 9085,4550 9085,4450 9600,3935 IC8.9
NetIC8_10: IC8.10 L8.2 | length 1251.6
  Bottom Layer w50: L8.2 9171.17,4563.83 9171.17,4597.47 9128.64,4640 9021.36,4640 8995,4613.64 8995,4437.71 9498.09,3934.62 9498.09,3816.91 IC8.10
NetIC8_11: IC8.11 L8.4 | length 1572.1
  Bottom Layer w50: L8.4 9375,4565.41 9355,4585.41 9355,4593.14 9238.14,4710 8992.37,4710 8925,4642.63 8925,4408.71 9400,3933.71 IC8.11
NetIC8_12: IC8.12 L8.6 | length 2026.9
  Bottom Layer w50: IC8.12 9300,3934.72 8855,4379.72 8855,4875 8945,4965 9356.01,4965 9471.17,5080.17 9471.17,5156.17 L8.6
NetIC8_13: IC8.13 L8.7 | length 2002.1
  Bottom Layer w50: IC8.13 9198.09,3816.91 9198.09,3919.9 8785,4332.99 8785,4968.02 8885.42,5068.43 9296.57,5068.43 9355,5126.86 9355,5134.59 9375,5154.59 L8.7
NetIC8_14: IC8.14 L8.10 | length 1773.1
  Bottom Layer w50: L8.10 8877.99,5160 8710,4992.01 8710,4308.99 9098.09,3920.91 9098.09,3816.91 IC8.14
NetIC8_15: IC8.15 L8.9 | length 2025.8
  Bottom Layer w50: IC8.15 9000,3920 8635,4285 8635,5016.01 8858.99,5240 9108.14,5240 9155,5193.14 9155,5185.41 9175,5165.41 L8.9
NetIC9_2: IC9.2 IC9.3 IC10.2 IC10.3 IC17.11 | length 6698.1
  Bottom Layer w50: IC9.2 IC9.3 1160,2465 1235,2390 1655,2390 1715,2450 1715,3250 1744.29,3279.29 1826.78,3279.29 1885,3221.07 1885,2640 2170,2355 2370,2355 ; IC10.3 IC10.2 2225,2500 2370,2355 ; IC17.11 5110,1880 4635,2355 2370,2355
NetIC10_14: IC10.14 IC20.11 | length 4848.7
  Top Layer w50: v1(1980,1835) v1(1980,2685)
  Bottom Layer w50: v1(1980,1835) 3988.4,1835 4878.4,945 IC20.11 ; v1(1980,2685) 1980,2840 2125,2985 IC10.14
NetIC11_2: IC11.2 IC11.3 IC12.2 IC12.3 IC17.8 IC20.12 pad.55 | length 7514.3
  Top Layer w50: pad.55 v1(2990,2470)
  Bottom Layer w50: pad.55 3975,1715 4845,845 IC20.12 ; v1(2990,2470) 3435,2470 ; IC11.3 IC11.2 3355,2550 3435,2470 ; IC12.3 IC12.2 4488.09,2703.09 4488.09,2648.09 4430,2590 ; IC17.8 5080,2180 4670,2590 4430,2590 ; 3435,2470 3840,2470 4000,2630 4000,3126.07 4048.93,3175 4115,3175 4165,3125 4165,2619.29 4194.29,2590 4430,2590
NetIC12_14: IC12.14 IC20.8 | length 2412.9
  Top Layer w50: v1(4240,2710) 4245,2705 4245,1930 v1(4250,1925)
  Bottom Layer w50: v1(4240,2710) 4240,2840 4386.73,2986.73 4386.73,3001.73 IC12.14 ; v1(4250,1925) 4930,1245 IC20.8
NetIC13_2: IC13.2 IC13.3 IC17.6 IC20.10 | length 1995.6
  Bottom Layer w50: IC20.10 5252.71,1045 5277.71,1070 5281.07,1070 5350,1138.93 5350,1911.07 5508.09,2069.15 5508.09,2081.91 5450,2140 5450,2430 5668.09,2648.09 5668.09,2698.09 IC13.2 IC13.3
NetIC14_14: IC14.14 IC20.3 | length 2904.3
  Top Layer w50: v1(6085,1915) 6085,1340 v1(6090,1335)
  Bottom Layer w50: IC20.3 5955,845 6090,980 v1(6090,1335) ; v1@6085,1920 6085,2215 6738.09,2868.09 6738.09,3003.09 IC14.14
NetIC15_2: IC15.2 IC15.3 IC17.3 IC20.2 | length 4353.9
  Bottom Layer w50: IC20.2 5517.29,745 5492.29,770 5488.93,770 5445,813.93 5445,1706.07 5517.02,1778.09 5538.09,1778.09 IC17.3 6210,1780 6515,2085 7910.71,2085 7940,2114.29 7940,2657.29 7965,2682.29 IC15.2@7965,2683.09 ; IC15.2 IC15.3
NetIC16_14: IC16.14 IC18.1 | length 3262.5
  Bottom Layer w50: IC18.1 8832.04,742.04 8822.2,742.04 8725.16,645 8414.29,645 8385,674.29 8385,1475 8445,1535 8635,1535 8860,1760 8860,2978.8 8889.29,3008.09 8975.38,3008.09 8980,3012.71 IC16.14
NetIC18_2: IC18.2 IC18.5 | length 471.3
  Bottom Layer w50: IC18.2 8833.27,846.73 8759.29,846.73 8730,876.02 8730,1110 8763.27,1143.27 8833.27,1143.27 IC18.5
NetIC18_3: IC18.3 IC19.3 | length 1798.9
  Bottom Layer w50: IC18.3 9670,945 9745,1020 9745,1740.71 9715.71,1770 IC19.3
NetIC19_10: IC19.10 R5.2 R6.2 | length 6968.7
  Bottom Layer w50: R6.2 7363.61,1505.79 7368.61,1500.79 R5.2 8004.21,1500.79 8070,1435 8070,545 8170,445 9780,445 9940,605 9940,2335 9765,2510 9302.29,2510 9223,2430.71 9223,2227 9279.62,2170.38 9319.62,2170.38 IC19.10
NetIC20_1: IC20.1 R4.1 SW3.1 | length 3378.9
  Top Layer w50: v1(4200,280) v1(4200,650)
  Bottom Layer w50: 4140,1415.79 3940.79,1615 3844.29,1615 3815,1585.71 3815,1125 3825.39,1114.61 4093.39,846.61 4093.39,805.19 4092.31,804.11 4092.31,762.69 v1@4206.44,648.56 ; v1(4200,280) 5160,280 5515,635 5515,640 5520,645 IC20.1
NetIC20_9: IC20.9 R3.1 SW2.1 | length 6075.5
  Bottom Layer w50: SW2.1@2470,811.76 2505,846.76 2505,1065 2505,1550 ; 3075,1390.79 2664.21,1390.79 2505,1550 ; IC20.9 4860,1145 4040,1965 1899.29,1965 1870,1935.71 1870,1720 1900,1690 2445,1690 2494.57,1640.43 2498.02,1640.43 2505,1633.46 2505,1550
NetIC20_13: IC20.13 R2.1 SW1.1 | length 5067.7
  Bottom Layer w50: 1870,1420.79 1719.21,1270 1550.79,1270 1519.29,1270 1490,1240.71 1490,790 1490,640 1490,499.29 1519.29,470 4940,470 5145,675 5145,676.07 5208.93,740 5212.29,740 5217.29,745 IC20.13
NetL1_3: L1.3 L1.8 L2.3 L2.8 L3.3 L3.8 L4.3 L4.8 L5.3 L5.8 L6.3 L6.8 L7.3 L7.8 L8.3 L8.8 R0.2 | length 20376.1
  Bottom Layer w50: R0.2 410,5095 605,5290 1095,5290 1226.17,5158.83 L1.8@1226.17,5141.17 ; L1.3 1230,4504.59 1250,4484.59 1250,4476.86 1296.86,4430 1480.71,4430 1510,4459.29 1510,5210 1435,5285 ; L1.8 1230,5115.41 1250,5135.41 1250,5143.14 1391.86,5285 1435,5285 ; L2.3 2398.83,4531.17 2398.83,4485.32 2429.14,4455 2660.71,4455 2690,4484.29 2690,5215 2610,5295 ; L3.8@3556.17,5158.14 3556.17,5204.54 3465.71,5295 2610,5295 ; L3.3 3563.83,4521.17 3563.83,4449.29 3593.12,4420 3810.71,4420 3840,4449.29 3840,5230 3775,5295 ; L3.8 3560,5130.41 3580,5150.41 3580,5158.14 3716.86,5295 3775,5295 ; 4656.17,5183.83 4545,5295 3775,5295 ; L4.3 4663.83,4521.17 4663.83,4444.29 4693.12,4415 4915.71,4415 4945,4444.29 4945,5200 4845,5300 ; L4.8 4663.83,5128.83 4663.83,5203.83 4760,5300 4845,5300 ; L5.8@5806.17,5183.83 5806.17,5238.83 5769.95,5275.05 5745,5300 4845,5300 ; L5.3 5813.83,4546.17 5813.83,4511.17 5880,4445 6070.71,4445 6100,4474.29 6100,5245 6030,5315 ; L5.8 5813.83,5153.83 5813.83,5183.83 5945,5315 6030,5315 ; 6970,5178.14 6833.14,5315 6030,5315 ; L6.3 6990,4539.59 7010,4519.59 7010,4511.86 7101.86,4420 7230,4420 7275,4465 7275,5230 7185,5320 ; L6.8@6993.83,5178.14 6993.83,5203.83 7110,5320 7185,5320 ; 8115,5183.14 7978.14,5320 7185,5320 ; L7.3 8138.83,4546.17 8138.83,4491.17 8200,4430 8390,4430 8420,4460 8420,5265 8360,5325 ; L7.8@8138.83,5183.14 8280.69,5325 8360,5325 ; L8.8@9255,5185.41 9255,5193.14 9123.14,5325 8360,5325 ; L8.3 9278.83,4556.17 9278.83,4491.17 9325,4445 9535,4445 9570,4480 9570,5210.71 9540.71,5240 9341.86,5240 9295,5193.14 9295,5185.41 9275,5165.41 L8.8 ; 1435,5285 2258.14,5285 2391.17,5151.96 2391.17,5138.83 L2.8 2395,5140.41 2415,5160.41 2415,5168.14 2541.86,5295 2610,5295
VCC: IC1.3 IC1.4 IC1.5 IC1.16 IC2.3 IC2.4 IC2.5 IC2.16 IC3.3 IC3.4 IC3.5 IC3.16 IC4.3 IC4.4 IC4.5 IC4.16 IC5.3 IC5.4 IC5.5 IC5.16 IC6.3 IC6.4 IC6.5 IC6.16 IC7.3 IC7.4 IC7.5 IC7.16 IC8.3 IC8.4 IC8.5 IC8.16 IC9.5 IC10.5 IC11.5 IC12.5 IC13.5 IC14.5 IC15.5 IC16.5 IC17.14 IC19.16 IC20.14 P1.1 R0.1 R2.2 R3.2 R4.2 | length 61736.7
  Top Layer w50: v1(490,2520) v1(1360,2520) ; v1(490,3370) v1(1430,3370) ; v1(490,4205) v1(1450,4205) ; v1(1570,3370) v1(2580,3370) ; v1(1660,4205) 2615,4205 v1(2620,4200) ; v1(2705,3370) v1(3670,3370) ; v1(2780,4200) 2785,4205 v1(3750,4205) ; v1(2945,2570) v1(3655,2570) ; v1(3845,3370) v1(4880,3370) ; v1(3965,4205) v1(4870,4205) ; v1(4980,3370) 4990,3380 v1(6035,3380) ; v1(5060,4210) v1(6030,4210) ; v1(5140,2525) 5145,2520 v1(5700,2520) ; v1(5870,2520) 5872.71,2520 5877.71,2525 v1(6600,2525) ; v1(6170,3380) v1(7205,3380) ; v1(6235,4215) 6240,4220 v1(7205,4220) ; v1(7310,3380) v1(8290,3380) ; v1(7440,4220) v1(8420,4220) ; v1(7640,2525) v1(8095,2525) ; v1(8430,3380) 9555,3380 v1(9560,3385) ; v1(8445,2530) 8450,2525 9130,2525 v1(9135,2520)
  Bottom Layer w50: R0.1 490,4263.03 v1(490,4205) ; IC1.16 890,3785.38 885.38,3790 610,3790 490,3670 ; IC1.3 IC1.4 IC1.5 1291.91,3478.09 1291.91,3457.02 1378.93,3370 v1(1570,3370) ; v1(1360,2520) IC9.5 ; v1(1450,4205) 1775.16,4205 2040,3940.16 IC2.16 ; IC2.3 IC2.4 IC2.5 2440,3467.29 2465,3442.29 2465,3438.93 2533.93,3370 v1(2705,3370) ; 2525,2653.93 2525,2599.29 2554.29,2570 v1(2945,2570) 2945,3085 2850,3180 2850,3501.63 3063.37,3715 3112.29,3715 3170,3772.71 IC3.16 3170,3891.01 3013,4048 2861.01,4200 v1(2780,4200) v1(2620,4200) ; IC10.5@2525,2682.29 IC10.5 ; 2605,1630 2605,1628.43 2609.53,1623.9 2629.92,1623.9 2638.82,1615 3645.71,1615 3660,1600.71 3660,1295 3475,1110 ; IC3.3 IC3.4 IC3.5 3570,3467.29 3595,3442.29 3595,3438.93 v1@3663.93,3370 ; v1(3655,2570) IC11.5 ; v1(3670,3370) v1(3845,3370) ; v1(3750,4205) 4020,4205 4310,3915 IC4.16 ; 3905,775 3900.45,779.55 3900.45,829.55 3705,1025 3620,1110 3475,1110 ; IC4.3 IC4.4 IC4.5 4710,3492.29 4735,3467.29 4735,3463.93 4828.93,3370 v1(4980,3370) ; IC12.5 4790,2600 4870,2520 5135,2520 v1(5140,2525) 5135,2530 5135,3580 5257.5,3702.5 5365,3810 IC5.16 5470,3825 5085,4210 v1(5060,4210) 5055,4205 v1(4870,4205) ; IC20.14 5222.71,645 5218.09,640.38 5218.09,628.09 4955,365 1380,365 1280,465 1280,775 1280,1268.69 1291.31,1280 1149.21,1280 390,1280 195,1475 195,4115 285,4205 v1(490,4205) ; IC17.14 5030,1580 4555,2055 610,2055 565,2010 565,1680 544.21,1659.21 544.21,1649.37 P1.1@529.84,1635 ; IC5.3 IC5.4 IC5.5 5870,3492.29 5895,3467.29 5895,3463.93 5988.93,3370 6025,3370 v1(6035,3380) v1(6170,3380) ; v1(5700,2520) v1(5870,2520) 5968.09,2618.09 5968.09,2698.09 IC13.5 ; v1(6030,4210) 6230,4210 v1(6235,4215) 6325,4215 6620,3920 6620,3832.71 6625,3827.71 IC6.16 ; v1(6600,2525) 7200,2525 ; IC6.3 IC6.4 IC6.5 7025,3492.29 7050,3467.29 7050,3463.93 7133.93,3380 v1(7310,3380) ; IC14.5 7140,2585 7200,2525 ; v1(7205,4220) v1(7440,4220) 7520,4220 7740,4000 7740,3842.71 7750,3832.71 IC7.16 ; v1(7640,2525) 7200,2525 ; IC7.3 IC7.4 IC7.5 8151.91,3513.09 8151.91,3478.09 8250,3380 v1(8430,3380) ; v1(8095,2525) 8370,2525 ; IC15.5 8265,2630 8370,2525 ; v1(8420,4220) 8560,4220 8900,3880 IC8.16 ; v1(8445,2530) 8440,2525 8370,2525 ; 8535,745 8536.33,746.33 8591.33,746.33 8650,805 8650,1385 8835,1570 IC19.16@9293.59,1570 ; IC8.3 IC8.4 IC8.5 9300,3497.29 9325,3472.29 9325,3468.93 9408.93,3385 v1(9560,3385) ; IC19.16 IC19.16@9293.59,1570 ; IC16.5 9380,2707.29 9355,2682.29 9355,2678.93 9196.07,2520 v1(9135,2520) 9070,2455 9070,1793.59 IC19.16@9293.59,1570 ; 490,3670 v1(490,4205) ; 490,3670 v1(490,3370) v1(490,2520) 490,1678.66 495.79,1672.87 495.79,1649.37 510.16,1635 P1.1@529.84,1635 ; P1.1@529.84,1635 564.84,1600 2019.71,1600 2210,1409.71 2210,790 2277.5,722.5 2587.5,722.5 2670,805 2917.89,1052.89 2975,1110 3475,1110
pads on no net: IC9.4 IC9.13 IC10.4 IC10.13 IC11.4 IC11.13 IC12.4 IC12.13 IC13.4 IC13.13 IC14.4 IC14.13 IC15.4 IC15.13 IC16.4 IC16.13 IC18.8 IC18.9 IC18.10 IC18.11 IC18.12 IC18.13 IC18.14 IC19.1 IC19.2 IC19.4 IC19.5 IC19.6 IC19.7 IC19.9 IC19.13 IC19.14 IC19.15 IC20.4 IC20.5 IC20.6 L1.5 L2.5 L3.5 L4.5 L5.5 L6.5 L7.5 L8.5